# Altium PCB zb_16f887.PcbDoc
Units mil, origin at the board's own origin, x right, y up, seen from the top; angles counter-clockwise.
Board outline 2975 x 3175 mil, 2 copper layers (Top Layer, Bottom Layer); 42 components, 54 nets, 155 pads, 8 vias.
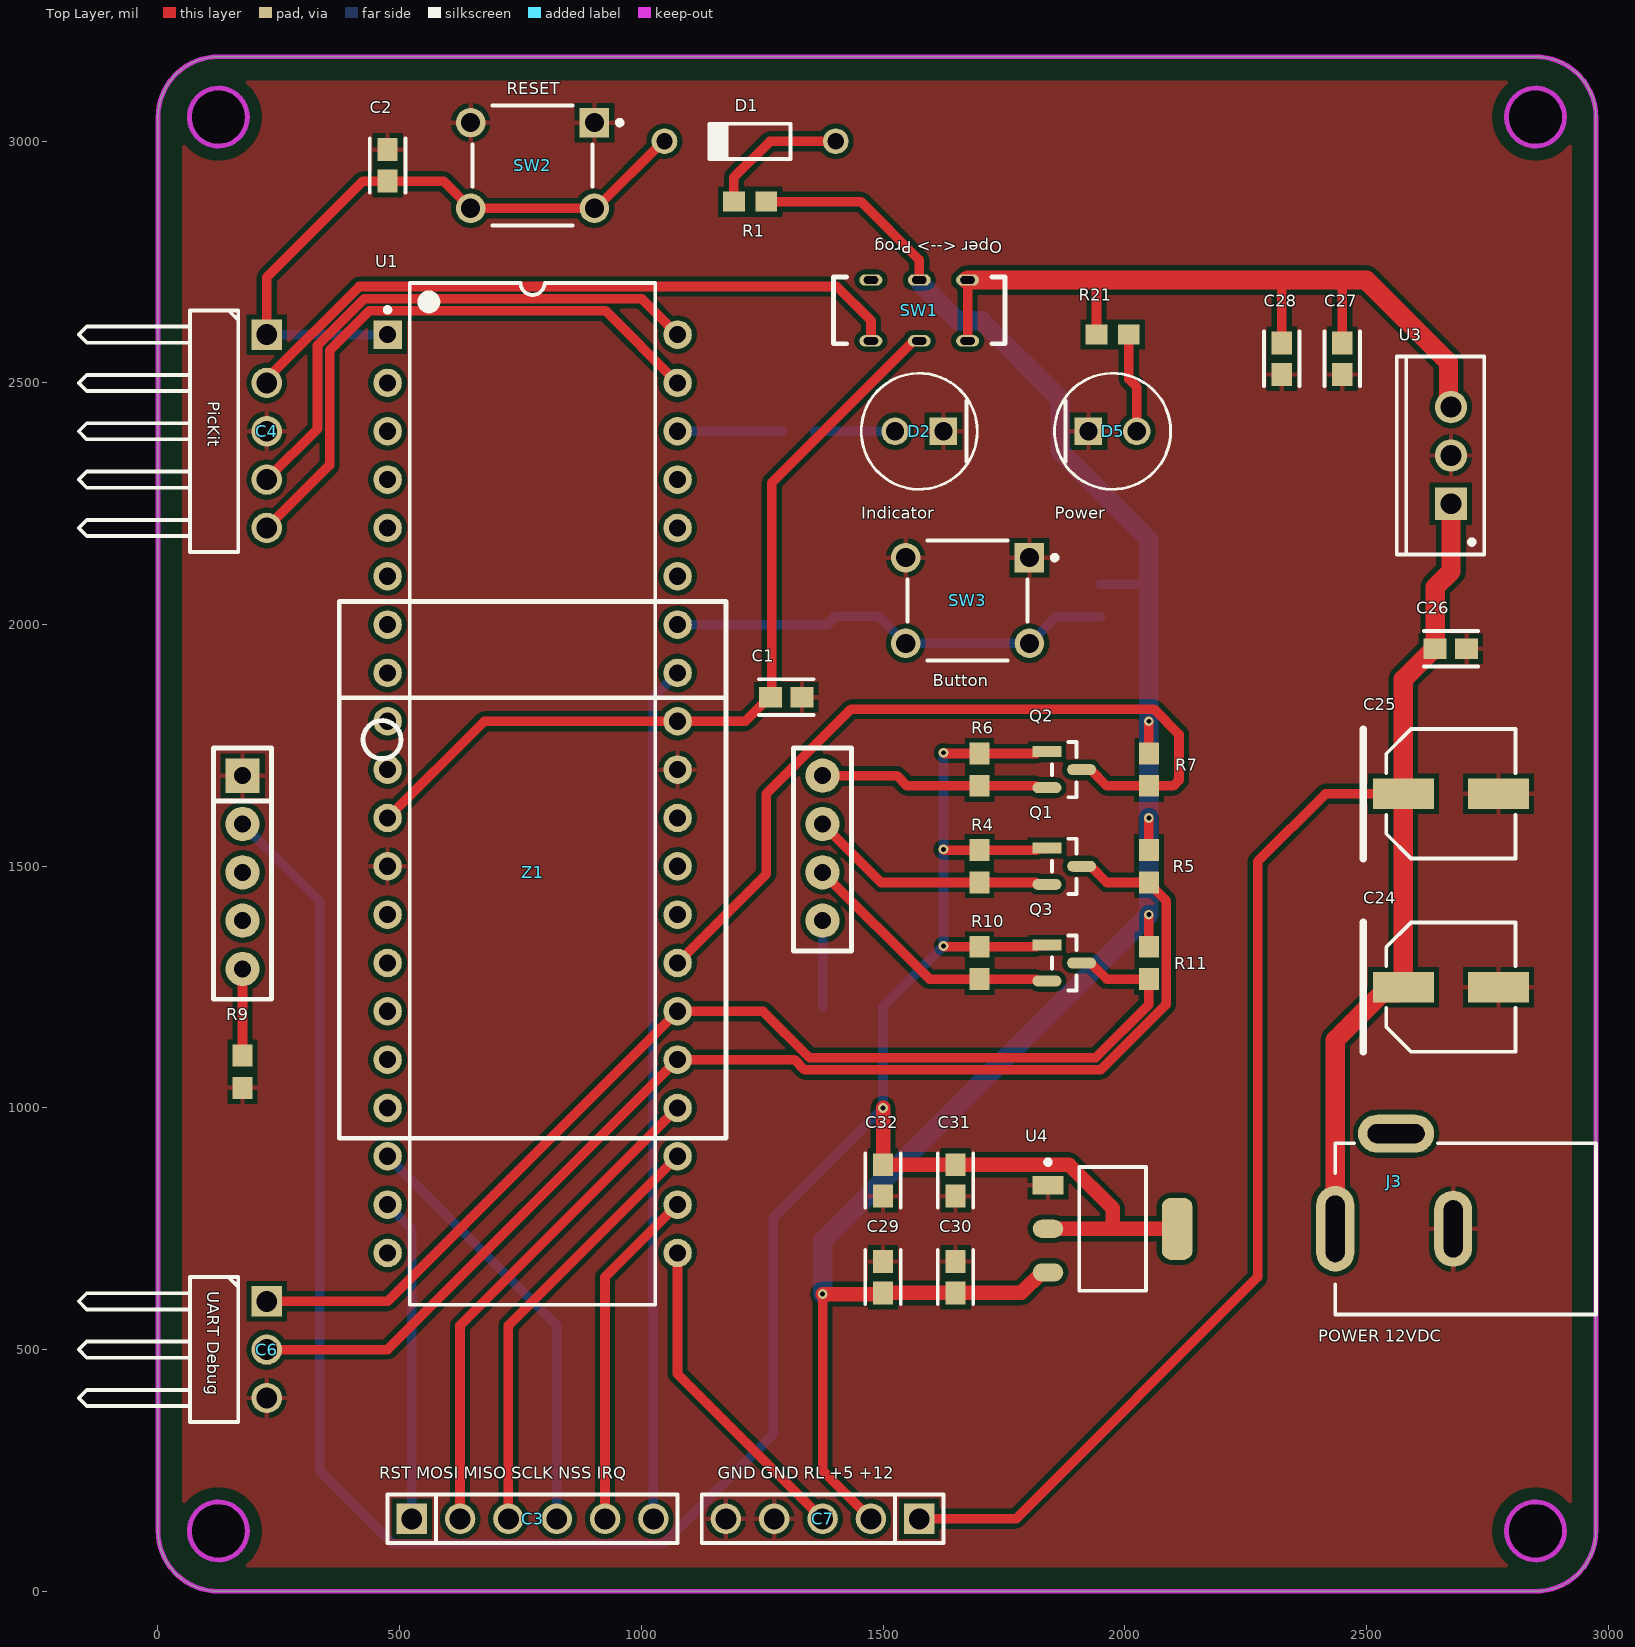
[diagram p0: Top Layer view]
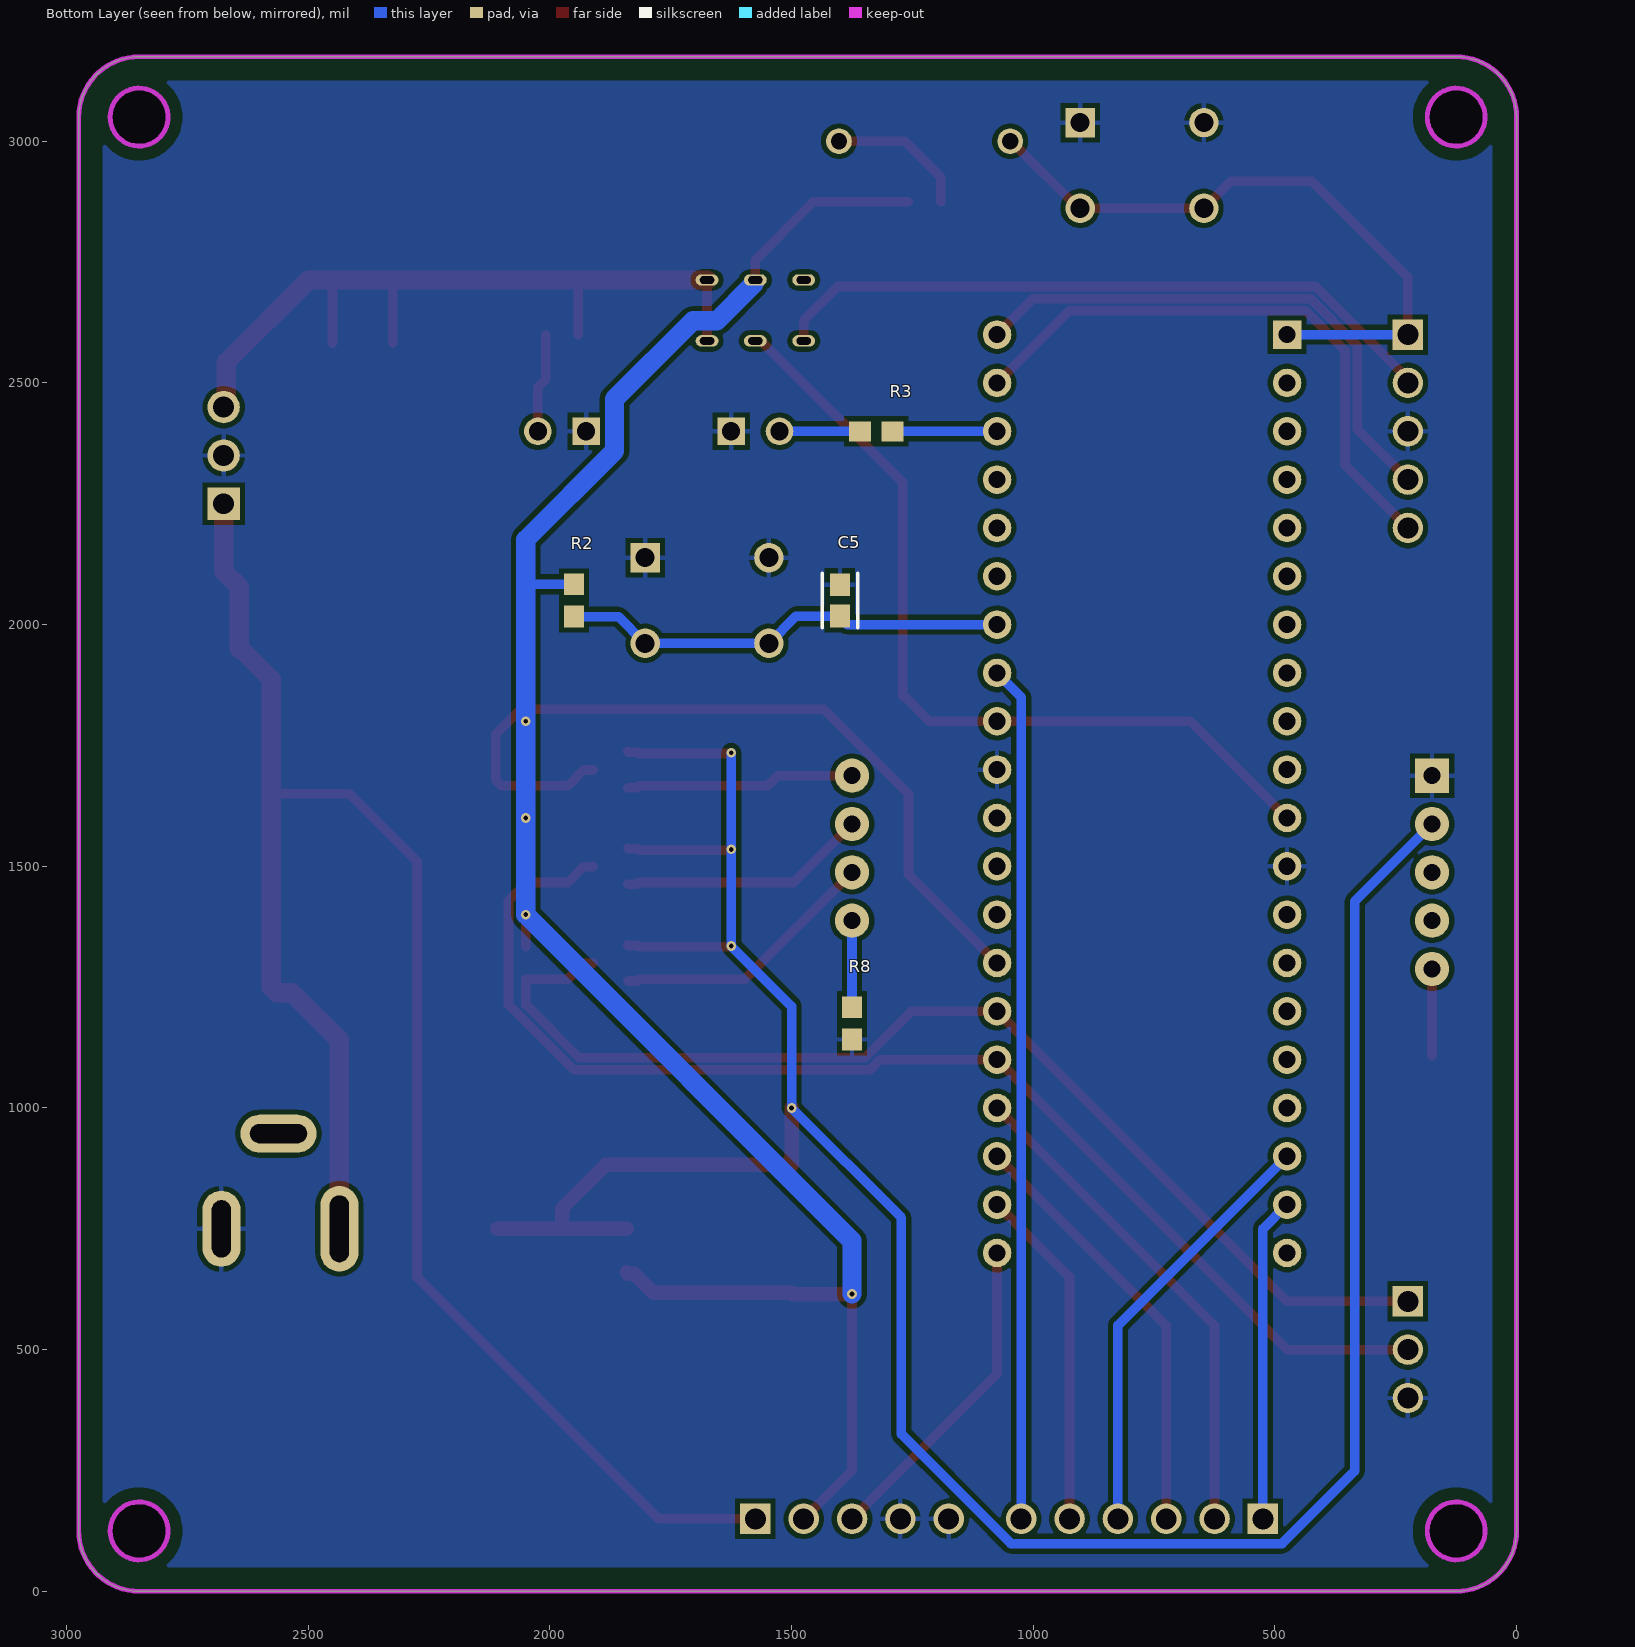
[diagram p1: Bottom Layer view, seen from below]
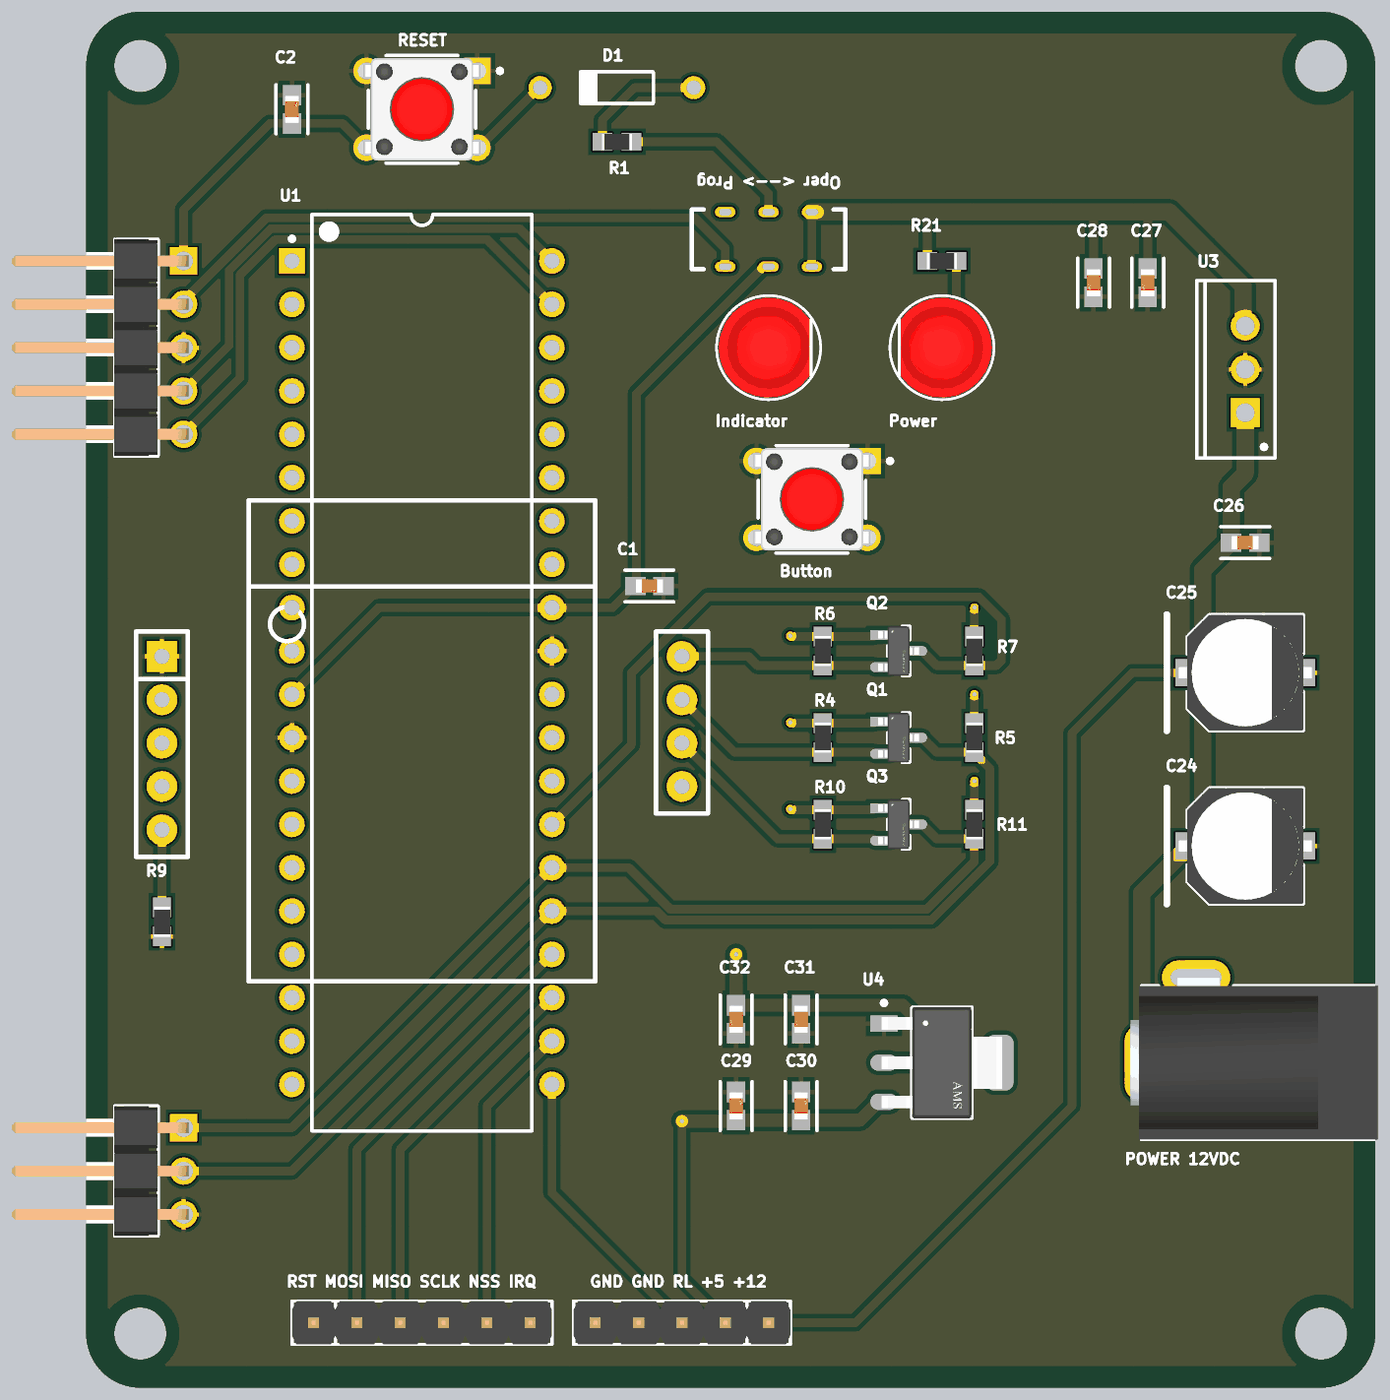
[diagram p2: 3D render of the assembled board from above, using the file's embedded part models]
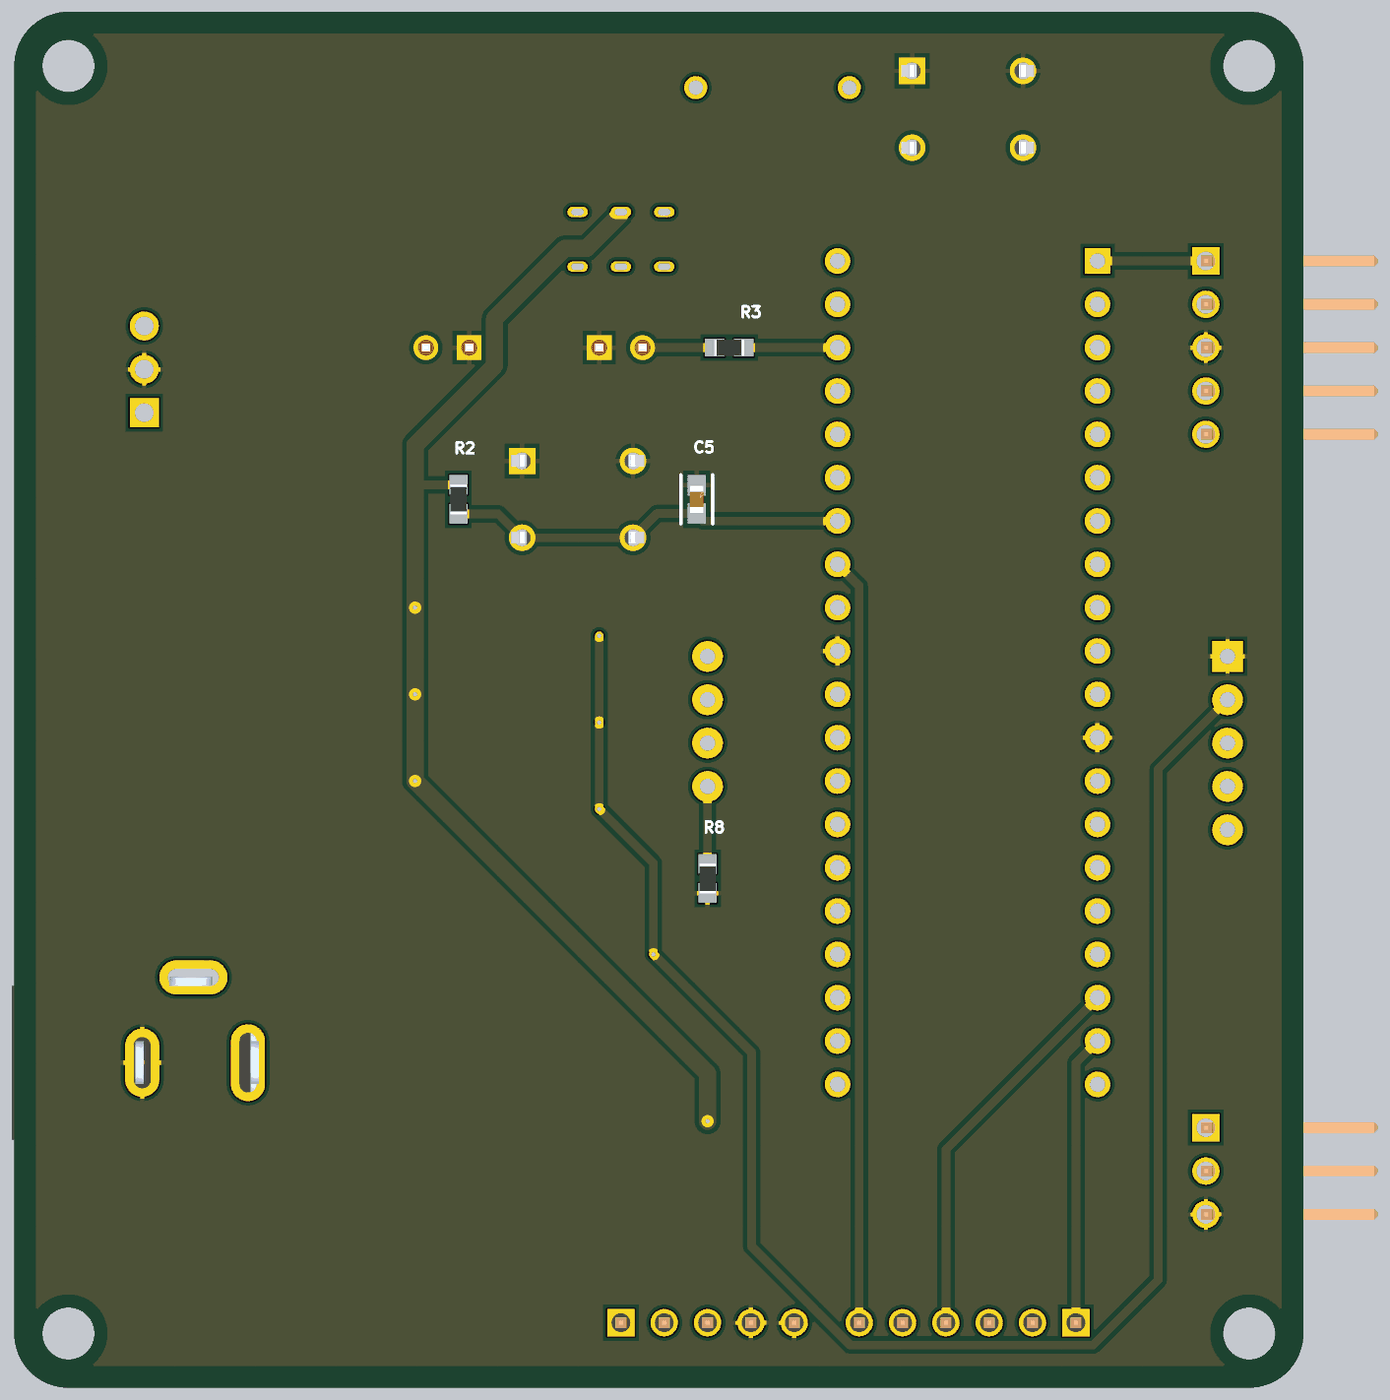
[diagram p3: 3D render of the assembled board from below, using the file's embedded part models]

## Layer stack, top to bottom
Top Solder: solder mask 0.4, Solder Resist, Dk 3.5
Top Layer: signal copper 1.4
Dielectric 1: dielectric 12.6, FR-4, Dk 4.8
Bottom Layer: signal copper 1.4
Bottom Solder: solder mask 0.4, Solder Resist, Dk 3.5

## Board outline
0,125 ccw(c125,125) 125,0 2850,0 ccw(c2850,125) 2975,125 2975,3050 ccw(c2850,3050) 2850,3175 125,3175 ccw(c125,3050) 0,3050
cut-out: 2790,3050 ccw(c2850,3050) 2850,2990 ccw(c2850,3050) 2910,3050 ccw(c2850,3050) 2850,3110 ccw(c2850,3050)
cut-out: 125,2990 cw(c125,3050) 65,3050 cw(c125,3050) 125,3110 cw(c125,3050) 185,3050 cw(c125,3050)
cut-out: 65,125 ccw(c125,125) 125,65 ccw(c125,125) 185,125 ccw(c125,125) 125,185 ccw(c125,125)
cut-out: 2790,125 ccw(c2850,125) 2850,65 ccw(c2850,125) 2910,125 ccw(c2850,125) 2850,185 ccw(c2850,125)

## Design rules (kind name [scope] priority, off if disabled: settings)
Clearance [All] p1: gap=5 ignorepadtopadclearanceinfootprint=TRUE except(10: Track-THPad Track-Poly SMDPad-Poly THPad-Poly Via-Poly; 20: Arc-THPad; 30: Poly-Region)
ComponentClearance [All] p1: gap=0 collisioncheckmode=3 verticalgap=0 showdistances=FALSE
HoleSize [All] p1: absolutevalues=TRUE maxlimit=150 minlimit=1 maxpercent=80.000 minpercent=20.000
MinimumSolderMaskSliver [All] p1: minsoldermaskwidth=1
PolygonConnect [All] p1: connectstyle=Relief reliefconductorwidth=10 reliefentries=4 polygonreliefangle="90 Angle" airgapwidth=10
RoutingVias [All] p1: holewidth=10 width=20 viastyle="Through Hole" minholewidth=5 minwidth=10 maxholewidth=20 maxwidth=50
SilkToSilkClearance [All] p1: silktosilkclearance=5
SilkToSolderMaskClearance [IsPad] p1: minsilkscreentomaskgap=5 clearancetoexposedcopper=TRUE
SolderMaskExpansion [All] p1: expansion=4 istentingtop=FALSE
Width [All] p1: maxlimit=100 minlimit=10 preferedwidth=20
25 further rules are at their usual default settings.

## Classes and differential pairs
component class power_supply: C24 C25 C26 C27 C28 C29 C30 C31 C32 D5 J3 R21 U3 U4
component class zb_pic16f887: 3 C1 C2 C3 C4 C5 C6 C7 D1 D2 Q1 Q2 Q3 R1 R2 R3 R4 R5 R6 R7 R8 R9 R10 R11 SW1 SW2 U1 Z1

## Components (designator, comment, footprint, x,y, rotation, side; value= is the part's Value field where it differs from the comment)
C1 "0.1uF" FP-0603-L_1_6_0_15-W_0_81-IPC_A 1300,1850 r0 top
C2 "10μF" FP-0603-L_1_6_0_15-W_0_81-IPC_A 475,2950 r90 top
C3 "ADE Control" JP6-D1T 525,150 r0 top
C4 "PicKit" JP5-D1C 125,2150 r270 top
C5 "10μF" FP-0603-L_1_6_0_15-W_0_81-IPC_A 1400,2050 r90 bottom
C6 "UART Debug" JP3-D1C 125,350 r270 top
C7 "Control" JP5-D1T 1575,150 r180 top
C24 "100uF" PNSC-FK-V-D8_V 2675,1250 r0 top
C25 "100uF" PNSC-FK-V-D8_V 2675,1650 r0 top
C26 "100nF" FP-0603-L_1_6_0_15-W_0_81-IPC_A 2675,1950 r0 top
C27 "10μF" FP-0603-L_1_6_0_15-W_0_81-IPC_A 2450,2550 r270 top
C28 "100nF" FP-0603-L_1_6_0_15-W_0_81-IPC_A 2325,2550 r270 top
C29 "100nF" FP-0603-L_1_6_0_15-W_0_81-IPC_A 1500,650 r90 top
C30 "10μF" FP-0603-L_1_6_0_15-W_0_81-IPC_A 1650,650 r90 top
C31 "10μF" FP-0603-L_1_6_0_15-W_0_81-IPC_A 1650,850 r270 top
C32 "100nF" FP-0603-L_1_6_0_15-W_0_81-IPC_A 1500,850 r270 top
D1 "1N4148" NXP-SOD27-2_V 1225,3000 r180 top
D2 "Indicator" FP-HLMP-4700-MFG 1575,2400 r180 top
D5 "Power" FP-HLMP-4700-MFG 1975,2400 r0 top
J3 "POWER 12VDC" KYCN-KLDX-0202-B_V 2975,750 r180 top
Q1 "BSS138" FP-318-08-IPC_B 1875,1500 r0 top
Q2 "BSS138" FP-318-08-IPC_B 1875,1700 r0 top
Q3 "BSS138" FP-318-08-IPC_B 1875,1300 r0 top
R1 "10K" RESC1609X55X30ML15T15 1225,2875 r0 top
R2 "10K" RESC1609X55X30ML15T15 1950,2050 r90 bottom
R3 "510" RESC1609X55X30ML15T15 1325,2400 r180 bottom
R4 "10K" RESC1609X55X30ML15T15 1700,1500 r90 top
R5 "10K" RESC1609X55X30ML15T15 2050,1500 r90 top
R6 "10K" RESC1609X55X30ML15T15 1700,1700 r90 top
R7 "10K" RESC1609X55X30ML15T15 2050,1700 r90 top
R8 "10K" RESC1609X55X30ML15T15 1375,1175 r90 bottom
R9 "10K" RESC1609X55X30ML15T15 175,1075 r90 top
R10 "10K" RESC1609X55X30ML15T15 1700,1300 r90 top
R11 "10K" RESC1609X55X30ML15T15 2050,1300 r90 top
R21 "1K" RESC1609X55X30ML15T15 1975,2600 r180 top
SW1 "MH-G6" MH-G6 1575,2650 r180 top
SW2 "RESET" FP-EVQ-PAG05R-MFG 775,2950 r270 top
SW3 "Button" FP-EVQ-PAG05R-MFG 1675,2050 r270 top
U1 "PIC16F887-I/P" PDIP600-P40 775,1650 r0 top
U3 "L7805CV" TO220 2675,2350 r90 top
U4 "AMS1117-3.3" FP-AMS1117-IPC_A 1975,750 r0 top
Z1 "SZ1V5" "SZ1V5 PINOUT MODULE" 775,1375 r0 top

## Footprints (in the part's own frame and the unit in brackets; to place one, negate y for a bottom-side part, rotate by r counter-clockwise, add the part's x,y. Pads: shape width x height; smd on the part's side, far side on the other; paste and mask are expansions set on the pad)
FP-318-08-IPC_B [mm]
  rect 1.524x0.578 smd paste+0 mask+0: 1(-0.91,0.95)
  rrect100% 1.524x0.578 smd paste+0 mask+0: 2(-0.91,-0.95) 3(0.91,0)
  silkscreen extent -0.65,-1.45 0.65,1.45, body extent -1.92,-1.7 1.92,1.7, height 0.25
FP-0603-L_1_6_0_15-W_0_81-IPC_A [mil]
  rect 47.5x42.06 smd paste+0 mask+0: 1(-32.51,0) 2(32.51,0)
  silkscreen extent -56,-37 56,37, body extent -76,-41 76,41, height 10
FP-AMS1117-IPC_A [mm]
  rect 1.604x0.952 smd paste+0 mask+0: 1(-3.395,2.29)
  rrect100% 1.604x0.952 smd paste+0 mask+0: 2(-3.395,0) 3(-3.395,-2.29)
  rrect59% 1.604x3.262 smd paste+0 mask+0: 4(3.395,0)
  silkscreen extent -3.52,-3.25 1.75,3.62, body extent -4.7,-3.75 4.7,3.75, height 0.25
FP-EVQ-PAG05R-MFG [mm]
  rect 1.55x1.55 hole 1 paste-1000 mask+0: A(-2.25,3.25)
  round 1.55 hole 1 paste-1000 mask+0: A'(-2.25,-3.25) B(2.25,3.25) B'(2.25,-3.25)
  silkscreen extent -3.15,-3.15 3.15,4.7, body extent -3.25,-4.13 3.25,4.13, height 0.25
FP-HLMP-4700-MFG [mm]
  rect 1.45x1.45 hole 0.95 paste-1000 mask+0: 1(-1.27,0)
  round 1.45 hole 0.95 paste-1000 mask+0: 2(1.27,0)
  silkscreen extent -3.05,-3.05 3.05,3.05, body extent -3.15,-3.15 3.15,3.15, height 0.25
JP3-D1C [mm] "3 pins, 1 row, right angled, gold plating"
  rect 1.6x1.6 hole 1.1: 1(-6.35,2.54)
  round 1.6 hole 1.1: 2(-3.81,2.54) 3(-1.27,2.54)
  silkscreen extent -7.62,-7.34 0,1.04, body extent -7.62,-7.52 0,2.84, height 2.55
JP5-D1C [mm] "5 pins, 1 row, right angled, gold plating"
  rect 1.6x1.6 hole 1.1: 1(-11.43,2.54)
  round 1.6 hole 1.1: 2(-8.89,2.54) 3(-6.35,2.54) 4(-3.81,2.54) 5(-1.27,2.54)
  silkscreen extent -12.7,-7.34 0,1.04, body extent -12.7,-7.52 0,2.84, height 2.55
JP5-D1T [mm] "5 pins, 1 row, straight, gold plating"
  rect 1.6x1.6 hole 1.1: 1(0,0)
  round 1.6 hole 1.1: 2(2.54,0) 3(5.08,0) 4(7.62,0) 5(10.16,0)
  silkscreen extent -1.27,-1.27 11.43,1.27, body extent -1.27,-1.27 11.43,1.27, height 8.54
JP6-D1T [mm] "6 pins, 1 row, straight, gold plating"
  rect 1.6x1.6 hole 1.1: 1(0,0)
  round 1.6 hole 1.1: 2(2.54,0) 3(5.08,0) 4(7.62,0) 5(10.16,0) 6(12.7,0)
  silkscreen extent -1.27,-1.27 13.97,1.27, body extent -1.27,-1.27 13.97,1.27, height 8.54
KYCN-KLDX-0202-B_V [mm] "3 Conductor Jack, 9 x 14.5 mm Body"
  oval 2x4.5 hole 1 slot 3.5 at 90 deg: 1(13.7,0)
  oval 2x4 hole 1 slot 3 at 90 deg: 2(7.5,0)
  oval 4x2 hole 1 slot 3 at 0 deg: 3(10.5,-5)
  silkscreen extent 0,-4.5 13.7,4.5, body extent -0.15,-5 14.35,4.5, height 11
MH-G6 [mm]
  rrect100% 1.2x0.6 hole 0.4 slot 0.75 at 0 deg: 1(-2.54,-1.6) 2(0,-1.6) 3(2.54,-1.6) 4(-2.54,1.6) 5(0,1.6) 6(2.54,1.6)
  silkscreen extent -4.5,-1.75 4.5,1.75
NXP-SOD27-2_V [mm] "SOD27, 2-Leads, Dia 1.85mm, Body Length 4.25mm, Pin Spacing 9mm"
  round 1.35 hole 0.85: 1(-4.5,0) 2(4.5,0)
  silkscreen extent -2.12,-0.92 2.12,0.93, body extent -4.78,-0.92 4.78,0.92, height 1.84
PDIP600-P40 [mm] "DIP, 40-Pin, Row Spacing 15.24 mm, Pitch 2.54 mm"
  rect 1.5x1.5 hole 0.9: 1(-7.62,24.13)
  round 1.5 hole 0.9: 2(-7.62,21.59) 3(-7.62,19.05) 4(-7.62,16.51) 5(-7.62,13.97) 6(-7.62,11.43) 7(-7.62,8.89) 8(-7.62,6.35) 9(-7.62,3.81) 10(-7.62,1.27) 11(-7.62,-1.27) 12(-7.62,-3.81) 13(-7.62,-6.35) 14(-7.62,-8.89) 15(-7.62,-11.43) 16(-7.62,-13.97) 17(-7.62,-16.51) 18(-7.62,-19.05) 19(-7.62,-21.59) 20(-7.62,-24.13) 21(7.62,-24.13) 22(7.62,-21.59) 23(7.62,-19.05) 24(7.62,-16.51) 25(7.62,-13.97) 26(7.62,-11.43) 27(7.62,-8.89) 28(7.62,-6.35) 29(7.62,-3.81) 30(7.62,-1.27) 31(7.62,1.27) 32(7.62,3.81) 33(7.62,6.35) 34(7.62,8.89) 35(7.62,11.43) 36(7.62,13.97) 37(7.62,16.51) 38(7.62,19.05) 39(7.62,21.59) 40(7.62,24.13)
  silkscreen extent -7.74,-26.85 6.45,26.85, body extent -7.3,-26.85 7.3,26.85, height 6.35
PNSC-FK-V-D8_V [mm] "CAPAE, 2-Leads, Body 6.80x6.80mm"
  rect 3.2x1.6 smd: 1(-2.5,0) 2(2.5,0)
  silkscreen extent -4.6,-3.4 3.4,3.4, body extent -3.9,-3.4 3.9,3.4, height 8
RESC1609X55X30ML15T15 [mm] "Chip Resistor, 2-Leads, Body 1.75x0.95mm, IPC Low Density"
  rect 1.15x1.05 smd: 1(-0.85,0) 2(0.85,0)
  body extent -0.87,-0.48 0.87,0.48, height 0.55
"SZ1V5 PINOUT MODULE" [mm]
  rect 1.8x1.8 hole 0.9: 1(-15.24,7.938)
  round 1.8 hole 0.9: 3(-15.24,5.397) 5(-15.24,2.857) 6(-15.24,0.318) 7(-15.24,-2.222) 13(15.24,7.938) 16(15.24,5.397) 17(15.24,2.857) 24(15.24,0.318)
  silkscreen extent -16.76,-11.11 16.76,17.08
TO220 [mm] "TO, Thru-Hole, Vertical, Heatsink Mounted; 3 In-Line Leads; Pitch 2.54 mm"
  rect 1.7x1.7 hole 1.1: 1(-2.54,0)
  round 1.7 hole 1.1: 2(0,0) 3(2.54,0)
  silkscreen extent -5.2,-1.75 5.2,2.85, body extent -5.25,-1.8 5.25,2.9, height 19.7

## Part data
C1 C2 C5 C27 C30 C31: library part CMP-1035-02592-4, "General Purpose Ceramic Capacitor, 0603, 100nF, 10%, X7R, 15%, 50V", Capacitance=100nF, Case Code (Imperial)=0603, Case Code (Metric)=1608, Dielectric=X7R, Dielectric Material=Ceramic, Max Operating Temperature=125°C, Min Operating Temperature=-55°C, Package Quantity=1, Tolerance=10%, Voltage=50V, Case/Package=0603, Contact Plating=Tin, Depth=0.81mm, Dissipation Factor=2.5%, Height=0.9mm, Lead Free="Lead Free", Length=1.6mm, Mount="Surface Mount", Number of Pins=2, Packaging="Tape and Reel", Radiation Hardening=No, REACH SVHC="No SVHC", Termination=SMD/SMT, Thickness=0.035inch, Voltage Rating=50V, Voltage Rating (DC)=50V, Width=0.81mm
C3: library part JP6, "WR-PHD 2.54 mm Angled Socket Header", Manufacturer="W¨¹rth Elektronik eiSos GmbH", partNo=613006143121, ComponentLink1 Description=Manufacturer, ComponentLink1URL=http://www.we-online.com, ComponentLink2 Description=Datasheet, ComponentLink2URL=http://katalog.we-online.de/em/datasheet/6130xx143121.pdf, Created by="Karrer Zheng", Created Date="29 March 2013", NoPins=06
C4 C7: library part JP5, "WR-PHD 2.54 mm Angled Socket Header", Manufacturer="W¨¹rth Elektronik eiSos GmbH", partNo=613005143121, ComponentLink1 Description=Manufacturer, ComponentLink1URL=http://www.we-online.com, ComponentLink2 Description=Datasheet, ComponentLink2URL=http://katalog.we-online.de/em/datasheet/6130xx143121.pdf, Created by="Karrer Zheng", Created Date="29 March 2013", NoPins=05
C6: library part JP3, "WR-PHD 2.54 mm Angled Socket Header", Manufacturer="W¨¹rth Elektronik eiSos GmbH", partNo=613003143121, ComponentLink1 Description=Manufacturer, ComponentLink1URL=http://www.we-online.com, ComponentLink2 Description=Datasheet, ComponentLink2URL=http://katalog.we-online.de/em/datasheet/6130xx143121.pdf, Created by="Karrer Zheng", Created Date="29 March 2013", NoPins=03
C24 C25: library part CMP-2000-06206-1, "Aluminum Electrolytic Capacitor, 100 uF, +/- 20%, 25 V, 2-Pin SMD (Size Code D8), -55 to 105 degC, RoHS, Tape and Reel", Capacitance=100µF, Case Size/Dimension=Ø6.3x7.7mm, Lifetime@Temperature=2000Hrs@105°C, Manufacturer=Panasonic, Operating Temp Range=-55to+105°C, Operating Temp-Max=105°C, Package Description="2-Pin Electrolytic Aluminum Capacitor, Body 6.6 x 6.6 mm", Package Reference=FK-V-D8, Rated Voltage=25V, Ripple Current=280mA, Datasheet URL=http://industrial.panasonic.com/cdbs/www-data/pdf/RDE0000/ABA0000C1181.pdf, Datasheet Version=03/2016, Impedance=0.34O, Manufacturer URL=http://www.panasonic.com/, Mounting Technology=SurfaceMount, Package URL=http://industrial.panasonic.com/cdbs/www-data/pdf/RDE0000/DME0000COL48.pdf, Series=FK, Type=Can
C26 C28 C29 C32: library part CMP-1035-02592-4, "General Purpose Ceramic Capacitor, 0603, 100nF, 10%, X7R, 15%, 50V", Case Code (Imperial)=0603, Case Code (Metric)=1608, Dielectric=X7R, Dielectric Material=Ceramic, Max Operating Temperature=125°C, Min Operating Temperature=-55°C, Package Quantity=1, Tolerance=10%, Voltage=50V, Capacitance=100nF, Case/Package=0603, Contact Plating=Tin, Depth=0.81mm, Dissipation Factor=2.5%, Height=0.9mm, Lead Free="Lead Free", Length=1.6mm, Mount="Surface Mount", Number of Pins=2, Packaging="Tape and Reel", Radiation Hardening=No, REACH SVHC="No SVHC", Termination=SMD/SMT, Thickness=0.035inch, Voltage Rating=50V, Voltage Rating (DC)=50V, Width=0.81mm
D1: library part CMP-0648-00002-1, "High-speed Diode, 100 V, 450 mA, 2-Pin SOD27, RoHS", Manufacturer="NXP Semiconductors", Cd="4 pF Max.", ComponentLink1Description="Manufacturer URL", ComponentLink1URL=http://www.nxp.com/, ComponentLink2Description=Datasheet, ComponentLink2URL=http://www.nxp.com/documents/data_sheet/1N4148_1N4448.pdf, ComponentLink3Description="Package Specification", ComponentLink3URL=http://www.nxp.com/documents/data_sheet/1N4148_1N4448.pdf, Configuration=Single, DatasheetVersion=Aug-04, IF="200 mA Max.", IFRM="450 mA", IFSM="4 A Max.", IR (VR="20 V)=25 nA", Mounting Technology="Through Hole", PackageDescription="2-Pin Hermetically Sealed Glass Package, Axial Leaded, Dia 1.85 mm, Body Length 4.25 mm, Lead Spread 25.4 mm", PackageReference=SOD27, PackageVersion=Aug-04, PartNumber=1N4148, RoHS=TRUE, Trr="4 ns Max.", VF (IF="10 mA)=1 V", VR="100 V Max."
D2 D5: library part CMP-18399-000008-1, "LED RED DIFFUSED T-1 3/4 T/H", Colour=Red, Forward Current=2mA, Forward Voltage=1.7V, Manufacturer=Broadcom, Manufacturer Part Number=HLMP-4700, Power Dissipation=14mW, Reverse Voltage=5V, Temperature="-40°C to +100°C", Temperature Range High=+100°C, Temperature Range Low=-40°C, Automotive=No, Category=Diode, ComponentLink2Description=Datasheet, ComponentLink2URL=https://docs.broadcom.com/docs/AV02-1557EN, Device Class L1=Optoelectronics, Device Class L2=LEDs, Device Class L3=unset, Digikey Description="LED RED DIFFUSED T-1 3/4 T/H", Lead Free=Yes, Led Orientation=Straight, Luminous Intensity=2.3mcd, Mouser Description="LED; Red; 2.3mcd; 0.24In.Dia.; T-1-3/4; 500mA; 1.7V; 635nm; 50deg; 5V; 24mW; -55degC;", Octopart=https://octopart.com/hlmp-4700-broadcom-71130526, Package=HLMP-4700, Peak Emmision Wavelength=635nm, RoHS=TRUE, Viewing Angle=50°, Wavelength=626nm
J3: library part CMP-0256-00001-1, "3 Conductor Power Jack, 2 break 2 aux contacts", PartNumber=KLDX-0202-B, ComponentLink1Description="Manufacturer URL", ComponentLink1URL=http://kycon.com/, ComponentLink2Description=Datasheet, ComponentLink2URL=http://anacapa.kycon.com/Catalog_PDF/KLDX_0202.pdf, Contact Finish=Brass, Mounting Technology="Through Hole", PackageDescription="Jack, 9 x 14.5 mm Body, 2.5 mm Center Pin Diameter", PackageReference=KLDX-0202-B
Q1 Q2 Q3: library part CMP-07173-000101-1, "MOSFET N-CH 50V 220MA SOT-23", Case/Package=SOT-23, Continuous Drain Current (ID)=220mA, Drain to Source Breakdown Voltage=50V, Drain to Source Resistance=3.5R, Gate to Source Voltage (Vgs)=20V, Input Capacitance=27pF, Max Operating Temperature=150°C, Max Power Dissipation=360mW, Min Operating Temperature=-55°C, On-State Resistance=6R, Package Quantity=1, Threshold Voltage=1.3V, Contact Plating=Tin, Current Rating=220mA, Drain to Source Voltage (Vdss)=50V, Dual Supply Voltage=50V, Element Configuration=Single, Fall Time=9ns, Height=0.93mm, Lead Free="Lead Free", Length=2.92mm, Mount="Surface Mount", Nominal Vgs=1.3V, Number of Elements=1, Number of Pins=3, Packaging="Tape and Reel", Power Dissipation=360mW, Radiation Hardening=No, Rds On Max=3.5R, REACH SVHC="No SVHC", Rise Time=9ns, Termination=SMD/SMT, Turn-Off Delay Time=20ns, Turn-On Delay Time=2.5ns, Voltage Rating (DC)=50V, Weight=0.03g, Width=1.3mm
R1 R2 R3 R4 R5 R6 R7 R8 R9 R10 R11 R21: library part CMP-1012-00623-3, "Chip Resistor, 10 KOhm, +/- 1%, 0.1 W, -55 to 155 degC, 0603 (1608 Metric), RoHS, Tape and Reel", Case Code (Imperial)=0603, Case Code (Metric)=1608, Manufacturer=Panasonic, Max Operating Temperature=155degC, Max Power Dissipation=100mW, Min Operating Temperature=-55degC, Package Description="2-Pin Surface Mount Device, Body 1.6 x 0.85 mm", Package Quantity=1, Package Reference=603, Resistance=10KOhm, Temperature Coefficient=100ppm\/degreesC, Tolerance=1%, Voltage Rating=75V, Case\/Package=0603, Composition=ThickFilm, Contact Plating=Tin, Datasheet URL=https://industrial.panasonic.com/cdbs/www-data/pdf/RDA0000/AOA0000C304.pdf, Datasheet Version=02/2017, Depth=0.8mm, Height=0.45mm, Lead Free=LeadFree, Length=1.6mm, Manufacturer URL=http://www.panasonic.com/, Military Standard=Not, Mount=SurfaceMount, Mounting Technology=SurfaceMount, Number of Pins=2, Number of Terminations=2, Packaging=TapeandReel, Power Rating=100mW, Radiation Hardening=No, REACH SVHC=NoSVHC, RoHSCompliant=true, Termination=SMD/SMT, Voltage Rating (DC)=75V, Width=0.031inch
SW1: "6-pin switch MH-G6 2.54mm"
SW2 SW3: library part CMP-05618-000039-1, "SWITCH TACTILE SPST-NO 0.02A 15V", Actuator Color=Red, Contact Current Rating=20mA, Contact Resistance=50mR, Max Operating Temperature=70°C, Max Voltage Rating (DC)=15V, Min Operating Temperature=-20°C, Operating Force=2.6N, Package Quantity=500, Actuator Length=1.6mm, Actuator Type=Standard, Contact Plating=Silver, Current Rating=20mA, Depth=6.5mm, Electrical Life=50000Cycles, Height=5mm, Illumination Type=Non-Illuminated, Lead Free="Lead Free", Length=6mm, Max Current Rating=20mA, Mechanical Life=50000Cycles, Mount="Through Hole", Orientation=Straight, Packaging=Bulk, Radiation Hardening=No, REACH SVHC="No SVHC", RoHS Compliant=Yes, Series=EVQPA, Size=6mm, Switch Function=Off-Mom, Switch Travel=0.25mm, Termination="PC Pin", Throw Configuration=SPST, Voltage Rating (DC)=15V, Width=6mm
U1: library part CMP-0115-00049-1, "Flash-Based, 8-Bit CMOS Microcontroller with nanoWatt Technology, 8K (x14-Bit words) Program Memory, 624 Bytes Data Memory, 35 I/O pins, 40-Pin PDIP, Standard VDD Range, Industrial Temperature", DatasheetVersion="revF, Apr-2009", PackageDescription="40-Lead Plastic Dual In-Line (P) - 600 mil Body [PDIP]", PackageReference=PDIP600-P40, PackageVersion="revBB, Aug-2009"
U3: library part CMP-0244-00483-1, "Positive Voltage Regulator, 5V, 3-Pin TO-220", ComponentLink1Description="Manufacturer URL", ComponentLink1URL=http://www.st.com, ComponentLink2Description=Datasheet, ComponentLink2URL=http://www.st.com/internet/com/TECHNICAL_RESOURCES/TECHNICAL_LITERATURE/DATASHEET/CD00000444.pdf, ComponentLink3Description="Package Specification", ComponentLink3URL=http://www.st.com/internet/com/TECHNICAL_RESOURCES/TECHNICAL_LITERATURE/PACKAGE_INFORMATION/CD00004649.pdf, DatasheetVersion=16/11/2011, PackageDescription="TO, Thru-Hole, Vertical, Heatsink Mounted; 3 In-Line Leads; Pitch 2.54 mm", PackageReference=TO220, PackageVersion=ver3.0
U4: library part CMP-209535-000001-1, "LDO Voltage Regulators 1A, 3.3V", Dropout Voltage=1.1V, Manufacturer="Advanced Monolithic Systems", Max Junction Temp=+125°C, Max Power Dissipation=1.2W, Max Supply Voltage=15V, Nominal Supply Current=5mA, Output Current=1A, Output Voltage=3.3V, Package=AMS1117, Temperature="-40°C to +125°C", Temperature Range Low=-40°C, Automotive=No, Category=IC, ComponentLink2Description=Datasheet, ComponentLink2URL=http://www.advanced-monolithic.com/pdf/ds1117.pdf, Device Class L1="Integrated Circuits (ICs)", Device Class L2="Power Management ICs", Device Class L3="Voltage Regulators - Linear", Height=1.8mm, Ipc Land Pattern Name=SOT229P700X180-4, Lead Free=Yes, Manufacturer Part Number=AMS1117-3.3, Number Of Outputs=1, Octopart=https://octopart.com/ams1117-3.3-advanced+monolithic+systems-25899300, Output Type=Fixed, RoHS=TRUE, Standoff Height=0.64mm, Temperature Range High=+125°C
Z1: library part SZ1V5_Alt

## Via types
v1: diameter 20, hole 10, Top Layer to Bottom Layer, 8 vias

## Nets (pads, with @x,y where several pads share a name; then routed paths per layer and width w, separated by ;. In a path a pad name is that pad's centre, name@x,y a point inside that pad or via, vN(x,y) a via of type N, cw(c..) or ccw(c..) an arc to the next point about the centre after c; other vN are vias at no path point)
+3: C31.1 C32.1 Q1.1 Q2.1 Q3.1 R4.2 R6.2 R10.2 U4.2 U4.4 Z1.3 | length 5643.6
  Top Layer w20: v1(1625,1335) 1626.54,1333.46 1816.6,1333.46 1819.16,1336.02 1837.79,1336.02 Q3.1 ; v1(1625,1535) 1626.54,1533.46 1816.6,1533.46 1819.16,1536.02 1837.79,1536.02 Q1.1 ; v1(1625,1735) 1626.54,1733.46 1816.6,1733.46 1819.16,1736.02 1837.79,1736.02 Q2.1
  Top Layer w30: v1(1500,1000) C32.1 1884.91,882.51 1975,792.43 1975,750 ; U4.2 1975,750 ; U4.4 1975,750
  Bottom Layer w20: Z1.3 334.98,1427.52 334.98,248.75 485.22,98.5 1046.33,98.5 1273.17,325.34 1273.17,773.17 v1(1500,1000) 1500,1210 v1(1625,1335) v1(1625,1735)
+5: C27.1 C28.1 R21.2 SW1.1 SW1.4 U3.3 | length 1660.1
  Top Layer w20: SW1.4 SW1.1 ; R21.2 1941.54,2712.99 ; C28.1 2325,2712.99 ; C27.1 2450,2712.99
  Top Layer w40: SW1.1 1941.54,2712.99 2325,2712.99 2450,2712.99 2499.5,2712.99 2669.85,2542.64 2669.85,2455.15 U3.3
+12: C7.1 C24.1 C25.1 C26.1 J3.1 U3.1 | length 3745.9
  Top Layer w20: C7.1 1775,150 2275,650 2275,1510 2415,1650 C25.1
  Top Layer w40: J3.1 2435.63,1140.55 2533.58,1238.5 2565.08,1238.5 C24.1 C25.1 2576.57,1886.81 2638.74,1948.97 2641.46,1948.97 C26.1 2642.49,2077.52 2675,2110.04 U3.1
ADE_RST: C3.1 U1.19 | length 670.7
  Bottom Layer w20: U1.19 525,750 C3.1
AGND: 
BUTTON: C5.1 R2.1 SW3.B SW3.B' U1.34 | length 929.9
  Bottom Layer w20: U1.34 1385.24,2000 1400,2014.76 C5.1 1490.98,2017.49 SW3.B' SW3.B 1858.07,2016.54 R2.1
CF: 
CFG0: R8.2 Z1.24 | length 179
  Bottom Layer w20: R8.2 Z1.24
CFG1: R9.2 Z1.7 | length 179
  Top Layer w20: R9.2 Z1.7
CLKIN: 
CLKOUT: 
GND: C1.2 C2.2 C4.3 C5.2 C6.3 C7.4 C7.5 C24.2 C25.2 C26.2 C27.2 C28.2 C29.2 C30.2 C31.2 C32.2 D2.1 D5.1 J3.2 R8.1 R9.1 SW2.A SW2.A' SW3.A SW3.A' U1.12 U1.31 U3.2 U4.1 Z1.1
IRQ: C3.6 U1.33 | length 1770.7
  Bottom Layer w20: C3.6 1025,1850 U1.33
LED_IND: R3.2 U1.38 | length 216.5
  Bottom Layer w20: U1.38 R3.2
MCLR/VPP: C2.1 C4.1 D1.2 SW2.B SW2.B' U1.1 | length 1354.4
  Top Layer w20: C4.1 225,2718.51 423.97,2917.49 590.98,2917.49 SW2.B' 906.1,2861.42 1044.69,3000 D1.2
  Bottom Layer w20: C4.1 U1.1
MISO: C3.3 U1.23 | length 895
  Top Layer w20: C3.3 725,550 U1.23
MOSI: C3.2 U1.24 | length 1036.4
  Top Layer w20: C3.2 625,550 U1.24
NetC18_2: 
NetCT1_1: 
NetCT1_2: 
NetCT1_3: 
NetCT1_4: 
NetD1_1: D1.1 R1.1 | length 292.1
  Top Layer w20: R1.1 1191.54,2925.67 1265.87,3000 D1.1
NetD2_2: D2.2 R3.1 | length 166.5
  Bottom Layer w20: R3.1 D2.2
NetD3_1: 
NetD4_1: 
NetD5_2: D5.2 R21.1 | length 206.8
  Top Layer w20: R21.1 2008.46,2507.95 2025,2491.42 D5.2
NetJ1_1: 
NetJ1_2: 
NetPT1_5: 
NetQ4_1: 
NetQ4_3: 
NetQ5_1: 
NetR17_1: 
NSS: C3.5 U1.22 | length 712.1
  Top Layer w20: C3.5 925,650 U1.22
P_RST: Q2.3 R7.1 U1.27 | length 1688.6
  Top Layer w20: U1.27 1258.29,1483.29 1258.29,1649.18 1434.11,1825 2060.36,1825 2112.39,1772.97 2112.39,1678.25 2100.67,1666.54 1962.93,1666.54 1930.36,1699.1 1911.73,1699.1 Q2.3
P_RX: C6.1 Q3.3 R11.1 U1.26 | length 2364.6
  Top Layer w20: C6.1 475,600 U1.26 1252.02,1200 1348.12,1103.9 1940,1103.9 2050,1213.9 R11.1 1962.93,1266.54 1930.36,1299.1 1911.73,1299.1 Q3.3
P_TX: C6.2 Q1.3 R5.1 U1.25 | length 2594.1
  Top Layer w20: C6.2 475,500 U1.25 1316.66,1100 1337.76,1078.9 1950.36,1078.9 2085.67,1214.21 2085.67,1428.9 2050,1464.57 R5.1 1962.93,1466.54 1930.36,1499.1 1911.73,1499.1 Q1.3
PGC: C4.5 U1.39 | length 1237.2
  Top Layer w20: C4.5 355.03,2330.03 355.03,2567.37 437.19,2649.53 925.47,2649.53 U1.39
PGD: C4.4 U1.40 | length 1137.2
  Top Layer w20: C4.4 330.03,2405.03 330.03,2577.72 426.83,2674.53 1000.47,2674.53 U1.40
PK_VDD: C4.2 SW1.6 | length 1408.5
  Top Layer w20: C4.2 225,2508.05 416.48,2699.53 1404.29,2699.53 1475,2628.82 SW1.6
RELAY: C7.3 U1.21 | length 674.3
  Top Layer w20: U1.21 1075,450 C7.3
SAG: 
SCLK: C3.4 U1.18 | length 895
  Bottom Layer w20: U1.18 825,550 C3.4
V1N: 
V1P: 
V2N: 
V2P: 
VCC: C7.2 C29.1 C30.1 R1.2 R2.2 R5.2 R7.2 R11.2 SW1.2 U4.3 | length 4292.7
  Top Layer w20: R1.2 1454.8,2875 1575,2754.8 SW1.2 ; v1(1375,615) 1375,250 C7.2 ; R11.2 v1(2050,1400) ; R5.2 v1(2050,1600) ; R7.2 v1(2050,1800)
  Top Layer w30: v1(1375,615) 1497.51,615 C29.1 1786.14,617.49 1826.05,657.4 1838.89,657.4 U4.3
  Bottom Layer w20: R2.2 2050,2083.46
  Bottom Layer w40: v1(1375,615) 1375,725 v1(2050,1400) 2050,2083.46 2050,2175.49 1866.46,2359.03 1866.46,2466.49 1704.13,2628.82 1654.61,2628.82 SW1.2@1578.62,2704.8
VDD: C1.1 SW1.5 U1.11 U1.32 | length 1767.3
  Top Layer w20: U1.11 675,1800 1214.76,1800 1264.76,1850 C1.1 1270,1852.51 1270,2293.82 1563.19,2587.01 SW1.5
Z_RST: Q2.2 R6.1 Z1.13 | length 474.5
  Top Layer w20: Z1.13 1528.57,1687.5 1549.53,1666.54 1815.86,1666.54 1819.79,1662.6 Q2.2
Z_RX: Q1.2 R4.1 Z1.16 | length 515.9
  Top Layer w20: Z1.16 1495.96,1466.54 1815.86,1466.54 1819.79,1462.6 Q1.2
Z_TX: Q3.2 R10.1 Z1.17 | length 557.3
  Top Layer w20: Z1.17 1595.96,1266.54 1815.86,1266.54 1819.79,1262.6 Q3.2
ZX: 
pads on no net: J3.3 SW1.3 U1.2 U1.3 U1.4 U1.5 U1.6 U1.7 U1.8 U1.9 U1.10 U1.13 U1.14 U1.15 U1.16 U1.17 U1.20 U1.28 U1.29 U1.30 U1.35 U1.36 U1.37 Z1.5 Z1.6

## Polygon pours and split planes (outlines as drawn)
GND on Bottom Layer "GND_L02_P001" (solid, pour order 1): 50,3125 2925,3125 2925,50 50,50
GND on Top Layer "GND_L01_P000" (solid, pour order 0): 50,3125 2925,3125 2925,50 50,50

## Keep-outs
Keep-Out Layer:
  circle w10: c125,125 r60
  circle w10: c2850,125 r60
  circle w10: c2850,3050 r60
  circle w10: c125,3050 r60
  lines w10: 0,125 ccw(c125,125) 125,0 2850,0 ccw(c2850,125) 2975,125 2975,3050 ccw(c2850,3050) 2850,3175 125,3175 ccw(c125,3050) 0,3050 0,125

## Silkscreen, mask and mechanical layers (free items; w line width, h text height)
Top Overlay:
  text "Oper <--> Prog" at 1747,2793.67 h25 r180
  text "RST MOSI MISO SCLK NSS IRQ" at 458,233 h25
  text "GND GND RL +5 +12" at 1158,233 h25